# Altium PCB AS5600_V1.1.PcbDoc
Units mm, origin at the board's own origin, x right, y up, seen from the top; angles counter-clockwise.
Board outline 34 x 34 mm, 2 copper layers (Top Layer, Bottom Layer); 12 components, 7 nets, 31 pads, 49 vias.
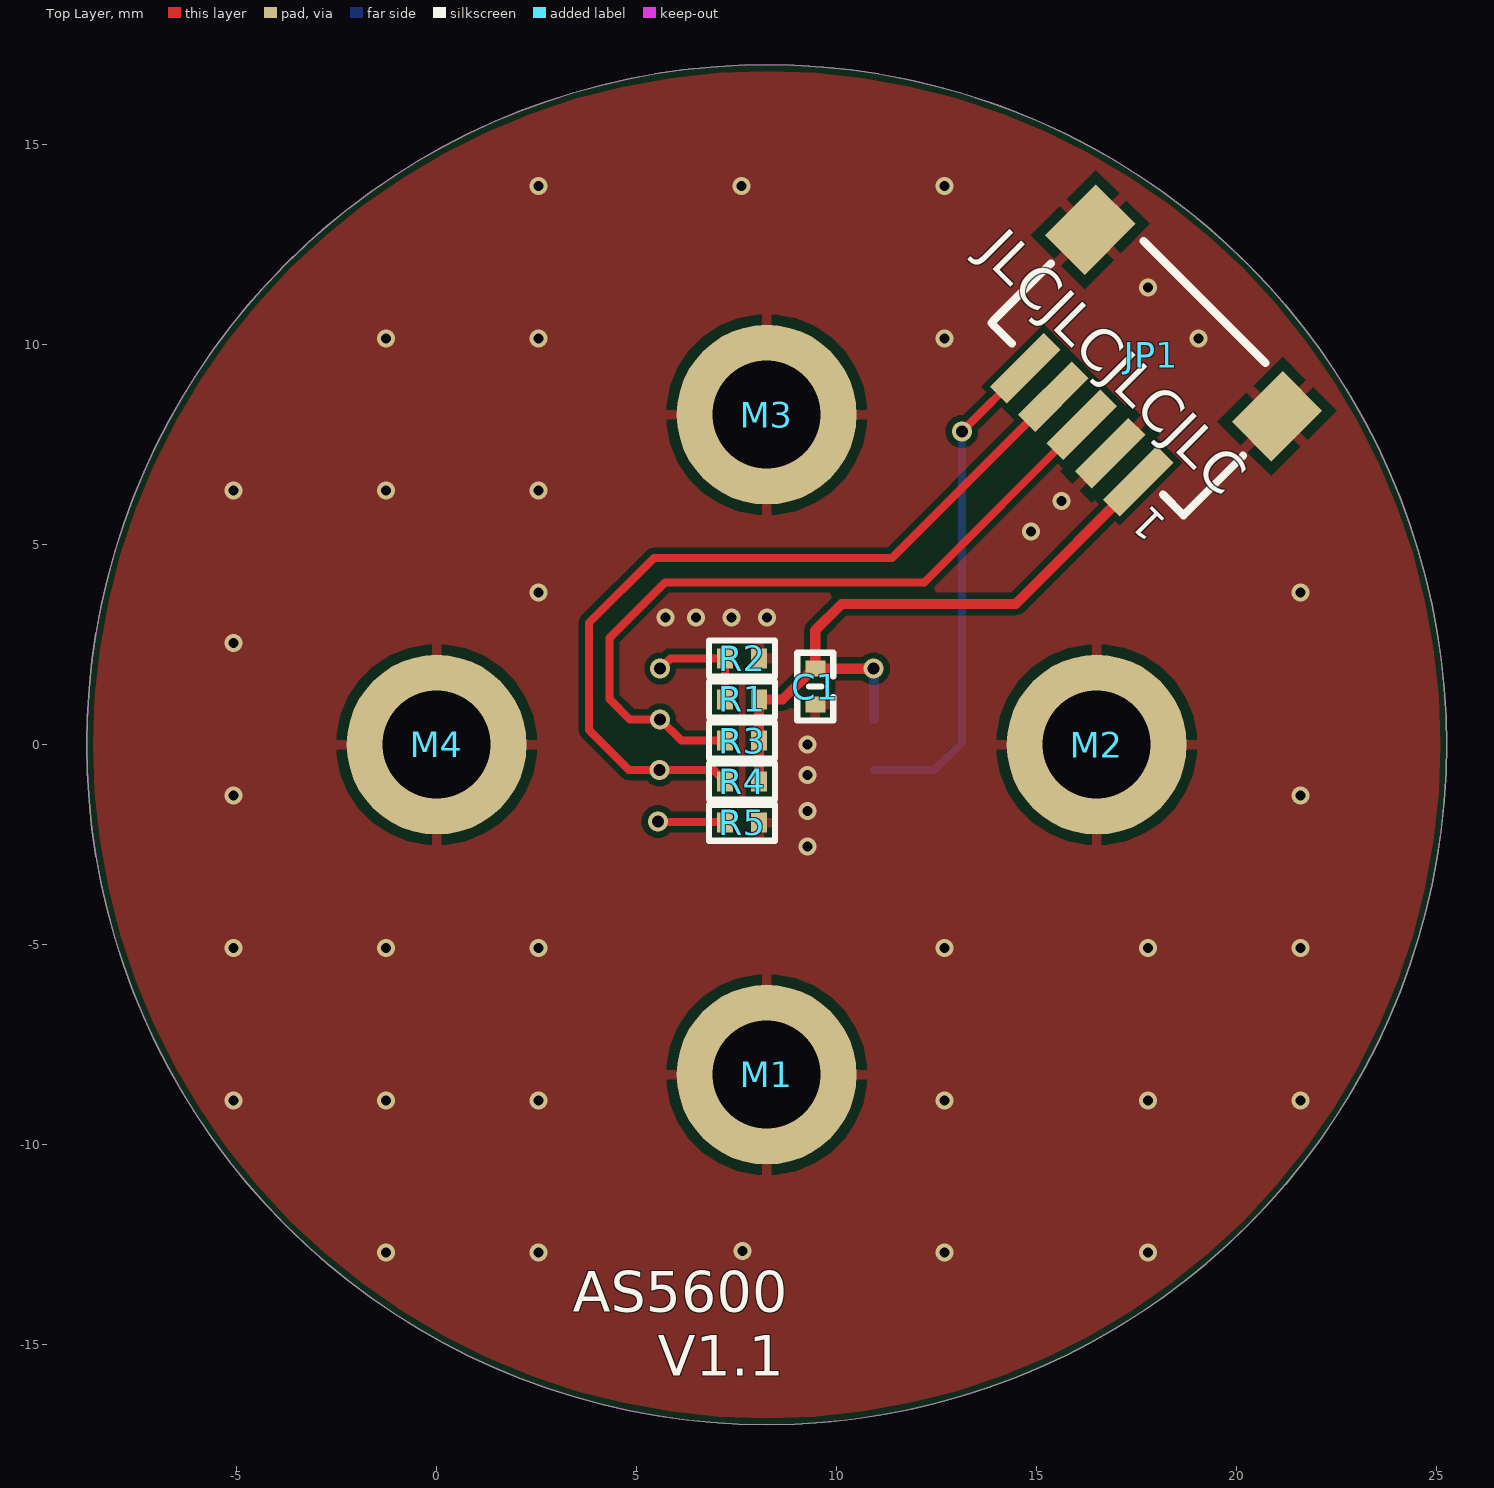
[diagram p0: Top Layer view]
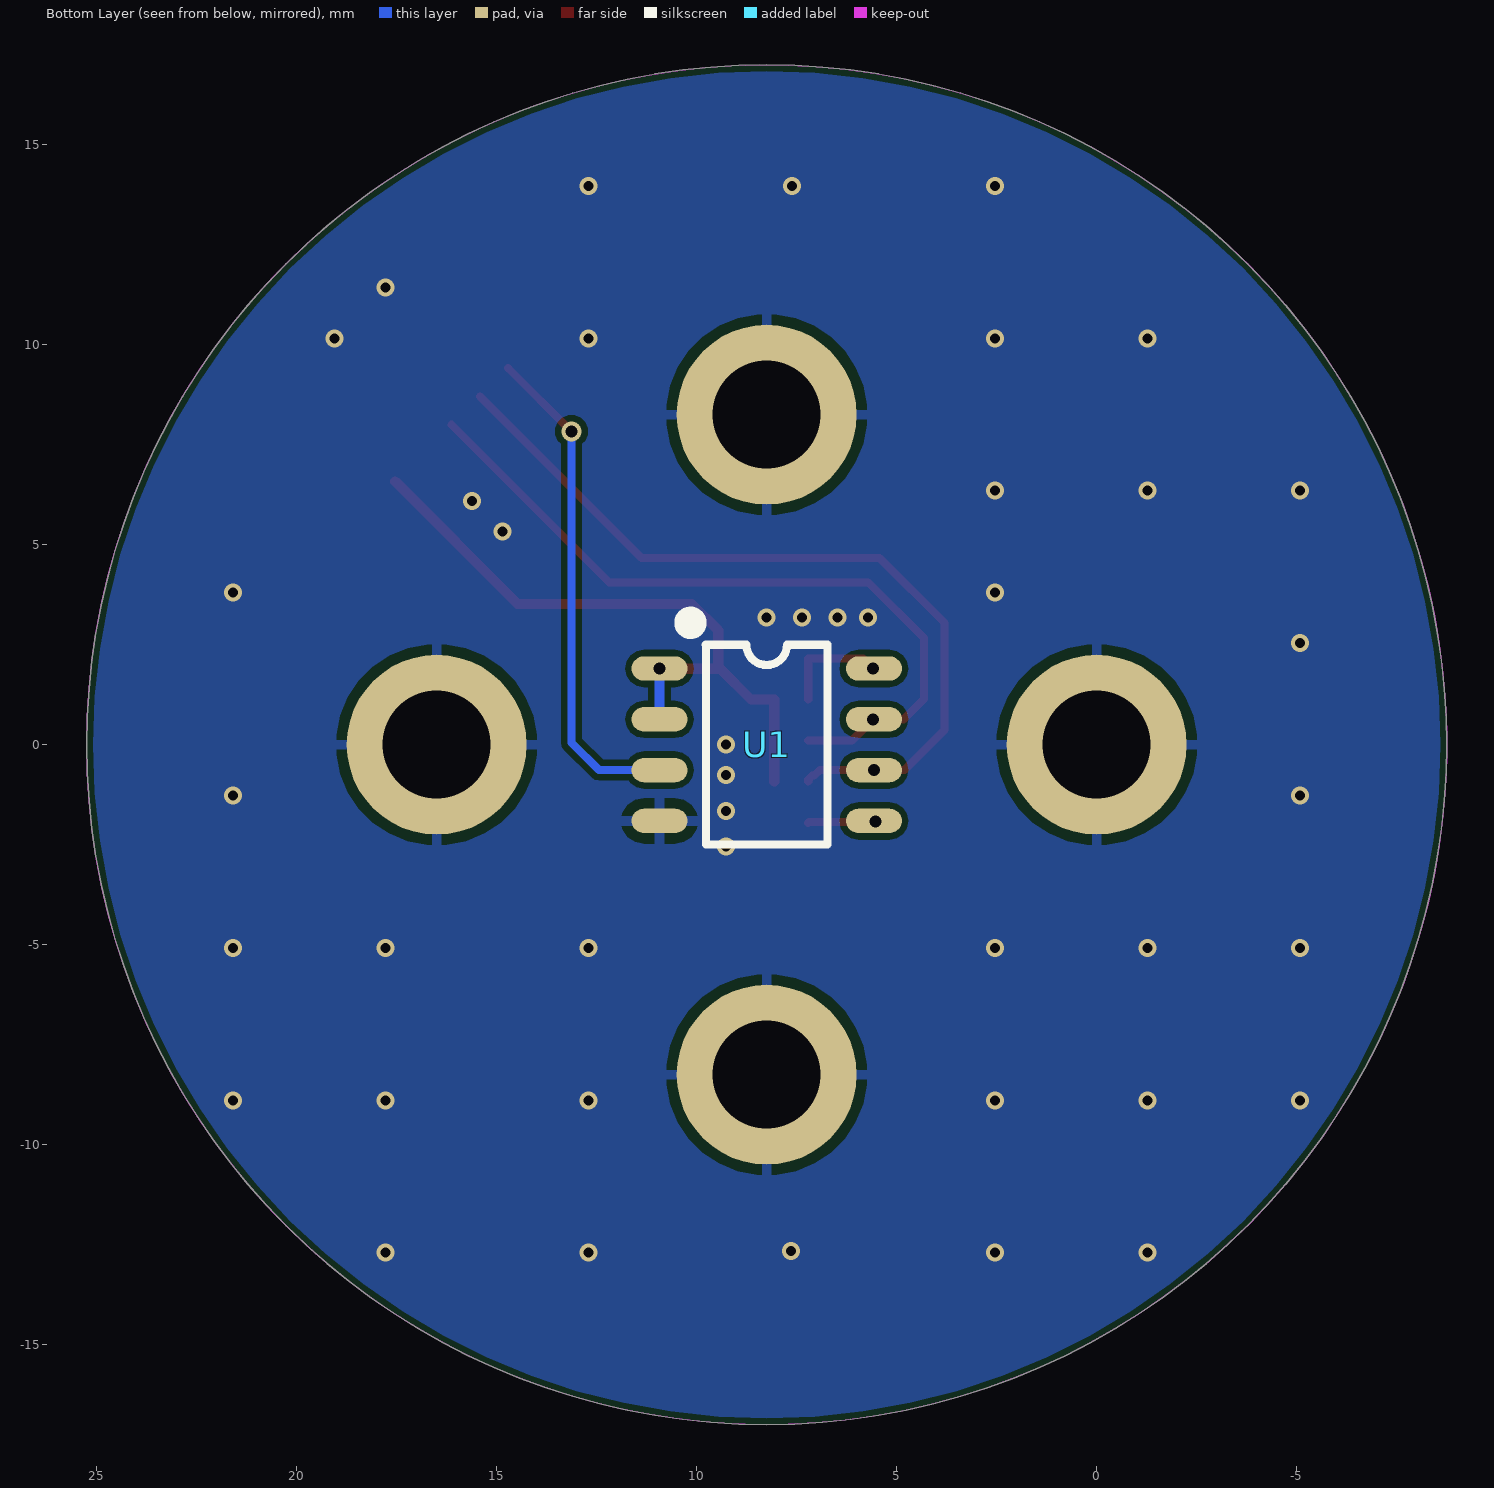
[diagram p1: Bottom Layer view, seen from below]
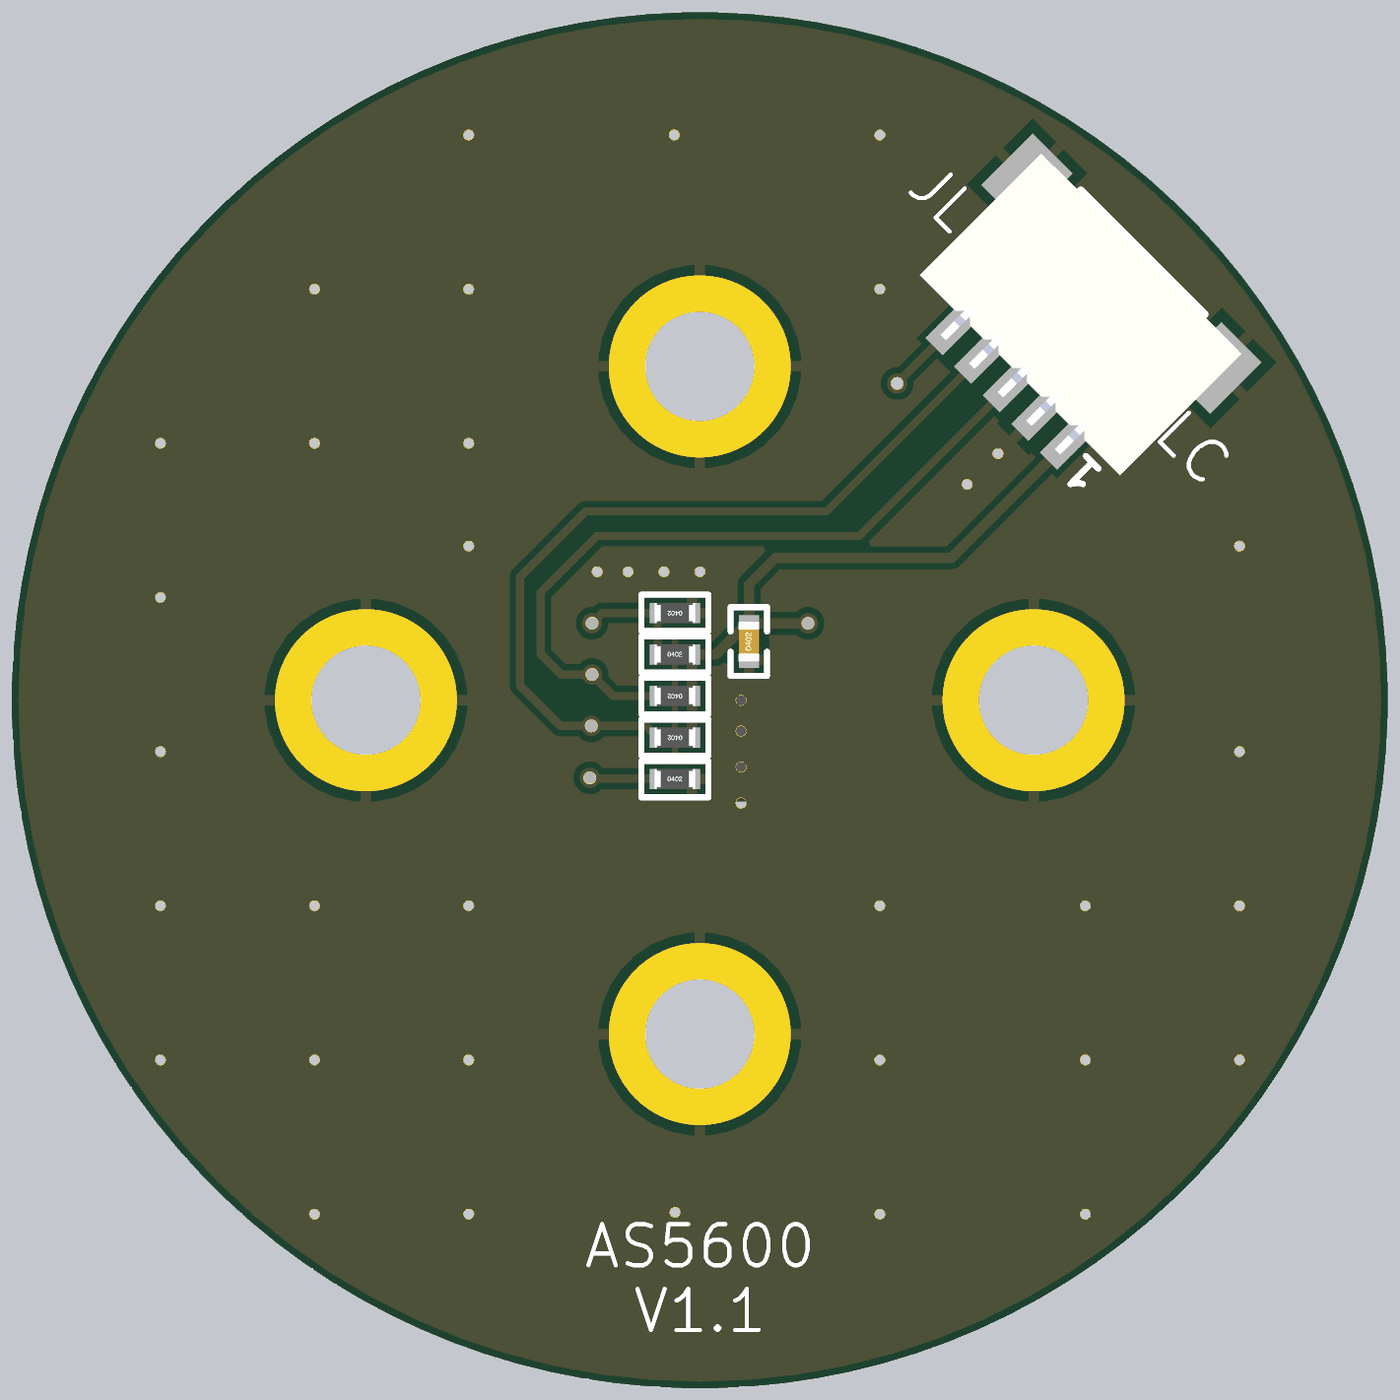
[diagram p2: 3D render of the assembled board from above, using the file's embedded part models]

## Layer stack, top to bottom
Top Solder: solder mask 0.0102, Solder Resist, Dk 3.5
Top Layer: signal copper 0.0356
Dielectric 1: dielectric 0.32, FR-4, Dk 4.8
Bottom Layer: signal copper 0.0356
Bottom Solder: solder mask 0.0102, Solder Resist, Dk 3.5

## Board outline
-8.75,0 ccw(c8.25,0) 8.25,-17 ccw(c8.25,0) 25.25,0 ccw(c8.25,0) 8.25,17 ccw(c8.25,0)

## Design rules (kind name [scope] priority, off if disabled: settings)
Clearance [All] p1: gap=0.152 ignorepadtopadclearanceinfootprint=FALSE
HoleToHoleClearance [All] p1: gap=0 allowstackedmicrovias=TRUE
MinimumSolderMaskSliver [All] p1: minsoldermaskwidth=0
PolygonConnect M2.5 [HasFootprint('M2焊盘')] p1: connectstyle=Direct reliefconductorwidth=0.254 reliefentries=4 polygonreliefangle="90 Angle" airgapwidth=0.254
PolygonConnect [All] p2: thpad.connectstyle=Relief thpad.reliefconductorwidth=0.254 thpad.reliefentries=4 thpad.polygonreliefangle="90 Angle" thpad.airgapwidth=0.254 smdpad.connectstyle=Relief smdpad.reliefconductorwidth=0.254 smdpad.reliefentries=4 smdpad.polygonreliefangle="90 Angle" smdpad.airgapwidth=0.254 via.connectstyle=Direct via.reliefconductorwidth=0.254 via.reliefentries=4 via.polygonreliefangle="90 Angle" via.airgapwidth=0.254
RoutingVias [All] p1: holewidth=0.25 width=0.45 viastyle="Through Hole" minholewidth=0.25 minwidth=0.45 maxholewidth=0.6 maxwidth=0.8
SilkToSilkClearance [All] p1: silktosilkclearance=0
SilkToSolderMaskClearance [IsPad] p1: minsilkscreentomaskgap=0 clearancetoexposedcopper=TRUE
SolderMaskExpansion [IsVia] p1: expansion=0.102 istentingtop=TRUE useseparateexpansions=TRUE expansionbottom=0.102 istentingbottom=TRUE
Width [All] p1: maxlimit=0.762 minlimit=0.152 preferedwidth=0.152
26 further rules are at their usual default settings.

## Components (designator, comment, footprint, x,y, rotation, side; value= is the part's Value field where it differs from the comment)
C1 "0.1uF" C0402_L 9.463,1.451 r90 top
JP1 "CON-5P" SH1.0-WT-5P 17.399,9.271 r135 top
M1 "M2.5" M2.5 8.25,-8.25 r0 top
M2 "M2.5" M2.5 16.5,0 r0 top
M3 "M2.5" M2.5 8.25,8.25 r0 top
M4 "M2.5" M2.5 0,0 r0 top
R1 "NC" R0402_L 7.635,1.132 r0 top
R2 "NC" R0402_L 7.635,2.159 r180 top
R3 "4.7K" R0402_L 7.635,0.105 r180 top
R4 "4.7K" R0402_L 7.635,-0.922 r180 top
R5 "4.7K" R0402_L 7.635,-1.95 r0 top
U1 "AS5600" SOIC-8L 8.25,0 r180 bottom locked

## Footprints (in the part's own frame and the unit in brackets; to place one, negate y for a bottom-side part, rotate by r counter-clockwise, add the part's x,y. Pads: shape width x height; smd on the part's side, far side on the other; paste and mask are expansions set on the pad)
C0402_L [mm] "无极性贴片电容"
  rect 0.4x0.5 smd: 1(-0.45,0) 2(0.45,0)
  silkscreen extent -0.85,-0.45 0.85,0.45, body extent -0.5,-0.26 0.5,0.26, height 0.54
M2.5 [mm]
  round 4.5 hole 2.7: 1(0,0)
R0402_L [mm] "1/16W贴片电阻"
  rect 0.4x0.5 smd: 1(-0.425,0) 2(0.425,0)
  silkscreen extent -0.82,-0.45 0.83,0.45, body extent -0.5,-0.25 0.5,0.25, height 0.3
SH1.0-WT-5P [mm] "SH1.0连接器-卧贴-5P      来自淘宝卖家ID：黄晶宝石"
  rect 1.4x1.8 smd: 0(-3.3,-1.8) 0(3.3,-1.8)
  rect 0.6x1.9 smd: 1(-2,1.8) 2(-1,1.8) 3(0,1.8) 4(1,1.8) 5(2,1.8)
  silkscreen extent -3.4,-2.54 3.4,1.6, body extent -3.5,-2.5 3.5,2.45, height 2.9
SOIC-8L [mm] "封装库来自淘宝卖家 ID：黄晶宝石，其他均为盗版"
  oval 1.397x0.61 smd: 1(-2.68,1.905) 2(-2.68,0.635) 3(-2.68,-0.635) 4(-2.68,-1.905) 5(2.68,-1.905) 6(2.68,-0.635) 7(2.68,0.635) 8(2.68,1.905)
  silkscreen extent -2.06,-2.5 1.52,3.2, body extent -3,-2.5 3,2.5, height 1.9

## Part data
C1: library part C, "贴片电容", BOM名称=无极性贴片电容, 联系卖家，免费查找封装=唯一出售店铺网址https://shop463601444.taobao.com
JP1: library part "Header 5", "5P连接器", BOM名称=5P连接器, 联系卖家 免费技术支持=封装库来自淘宝卖家ID：黄晶宝石, 联系卖家 免费查找封装=唯一出售店铺网址https://shop463601444.taobao.com
M1 M2 M3 M4: library part M2系列, "M2孔支撑柱"
R1 R2 R3 R4 R5: library part R, "贴片电阻", BOM名称=贴片电阻, 联系卖家，免费查找封装=唯一出售店铺网址https://shop463601444.taobao.com
U1: "12bit 磁编码器"

## Via types
v1: diameter 0.45, hole 0.25, Top Layer to Bottom Layer, tented both sides, 43 vias
v2: diameter 0.5, hole 0.3, Top Layer to Bottom Layer, tented both sides, 6 vias

## Nets (pads, with @x,y where several pads share a name; then routed paths per layer and width w, separated by ;. In a path a pad name is that pad's centre, name@x,y a point inside that pad or via, vN(x,y) a via of type N, cw(c..) or ccw(c..) an arc to the next point about the centre after c; other vN are vias at no path point)
AS5600_OUT: JP1.5 U1.3 | length 12.5
  Top Layer w0.203: v2(13.129,7.829) JP1.5
  Bottom Layer w0.203: U1.3 12.446,-0.635 13.129,0.048 v2(13.129,7.829)
AS5600_SCL: JP1.3 R3.2 U1.7 | length 18.9
  Top Layer w0.203: R3.2 6.118,0.105 v2(5.588,0.635) 4.826,0.635 4.318,1.143 4.318,2.667 5.711,4.06 12.188,4.06 JP1.3
  Bottom Layer w0.203: U1.7 v2(5.588,0.635)
AS5600_SDA: JP1.4 R4.2 U1.6 | length 20.6
  Top Layer w0.203: R4.2 7.21,-0.872 7.112,-0.774 7.062,-0.774 6.923,-0.635 v2(5.57,-0.635) 4.81,-0.635 3.81,0.365 3.81,3.048 5.431,4.669 11.383,4.669 JP1.4
GND: C1.1 JP1.0 JP1.2 M1.1 M2.1 M3.1 M4.1 R2.1 R5.2 U1.4
  other v1: -1.27,-12.7 2.54,-12.7 12.7,-12.7 17.78,-12.7 7.64,-12.655 -5.08,-8.89 -1.27,-8.89 2.54,-8.89 12.7,-8.89 17.78,-8.89 21.59,-8.89 -5.08,-5.08 -1.27,-5.08 2.54,-5.08 12.7,-5.08 17.78,-5.08 21.59,-5.08 9.271,-2.54 9.271,-1.651 -5.08,-1.27 21.59,-1.27 9.271,-0.762 9.271,0 -5.08,2.54 5.715,3.175 6.477,3.175 7.366,3.175 8.255,3.175 2.54,3.81 21.59,3.81 14.859,5.334 15.621,6.096 -5.08,6.35 -1.27,6.35 2.54,6.35 -1.27,10.16 2.54,10.16 12.7,10.16 19.05,10.16 17.78,11.43 2.54,13.97 7.62,13.97 12.7,13.97
NetR1_1: R1.1 R2.2 U1.8 | length 2.8
  Top Layer w0.203: v2(5.588,1.905) 5.842,2.159 R2.2 R1.1
  Bottom Layer w0.203: U1.8 v2(5.588,1.905)
NetR5_1: R5.1 U1.5 | length 1.7
  Top Layer w0.203: v2(5.534,-1.919) 5.549,-1.934 7.195,-1.934 R5.1
  Bottom Layer w0.203: v2(5.534,-1.919) 5.556,-1.919 U1.5
VCC_3V3: C1.2 JP1.1 R1.2 R3.1 R4.1 U1.1 U1.2 | length 17.1
  Top Layer w0.254: R4.1 R3.1 R1.2 8.645,1.132 9.413,1.9 C1.2 ; v2(10.925,1.9) C1.2 ; JP1.1 14.476,3.519 10.123,3.519 9.463,2.859 C1.2
  Bottom Layer w0.254: U1.2 10.93,1.896 v2(10.925,1.9) U1.1

## Polygon pours and split planes (outlines as drawn)
GND on Top Layer "GND_L01_P000" (solid, remove dead copper, pour order 0): -9.144,17.399 -9.144,-17.272 25.781,-17.272 25.781,17.399
GND on Bottom Layer "GND_L02_P001" (solid, remove dead copper, pour order 1): -9.144,17.399 -9.144,-17.272 25.781,-17.272 25.781,17.399

## Keep-outs
Keep-Out Layer:
  circle w0.013: c8.25,0 r17

## Silkscreen, mask and mechanical layers (free items; w line width, h text height)
Top Overlay:
  text "JLCJLCJLCJLC" at 13.51,12.272 h1.02 r315
  text "AS5600" at 3.401,-14.173 h1.02
  text "V1.1" at 5.527,-15.773 h1.02
Mechanical 1:
  circle w0.013: c8.25,0 r17
Mechanical 2:
  circle w0.013: c8.25,-8.25 r1.25
  circle w0.013: c16.5,0 r1.25
  circle w0.013: c0,0 r1.25
  circle w0.013: c0,0 r1.25
  circle w0.013: c8.25,8.25 r1.25
  circle w0.013: c8.25,0 r17
Mechanical 3:
  circle w0.006: c0,0 r0.003
  circle w0.006: c16.5,-21.603 r0.003
  circle w0.006: c8.25,8.25 r0.003
  circle w0.006: c8.25,-8.25 r0.003
  circle w0.006: c20.951,11.3 r0.003
  circle w0.006: c-4.451,-11.3 r0.003
  circle w0.006: c8.754,9.394 r0.003
  circle w0.006: c7.746,7.106 r0.003

## Text inside footprints (layer, text, board x,y; h text height)
JP1: Top Overlay "1" at 18.283,5.559 h0.76 r135